# Altium PCB PCB1.PcbDoc (part 1 of 6)
Units mil, origin at the board's own origin, x right, y up, seen from the top; angles counter-clockwise.
Board outline 58000 x 19845 mil, 4 copper layers (Top Layer, MidLayer1, MidLayer2, Bottom Layer); 162 components, 222 nets, 4894 pads, 2245 vias.
Unrouted connection lines stored in the file: 192.
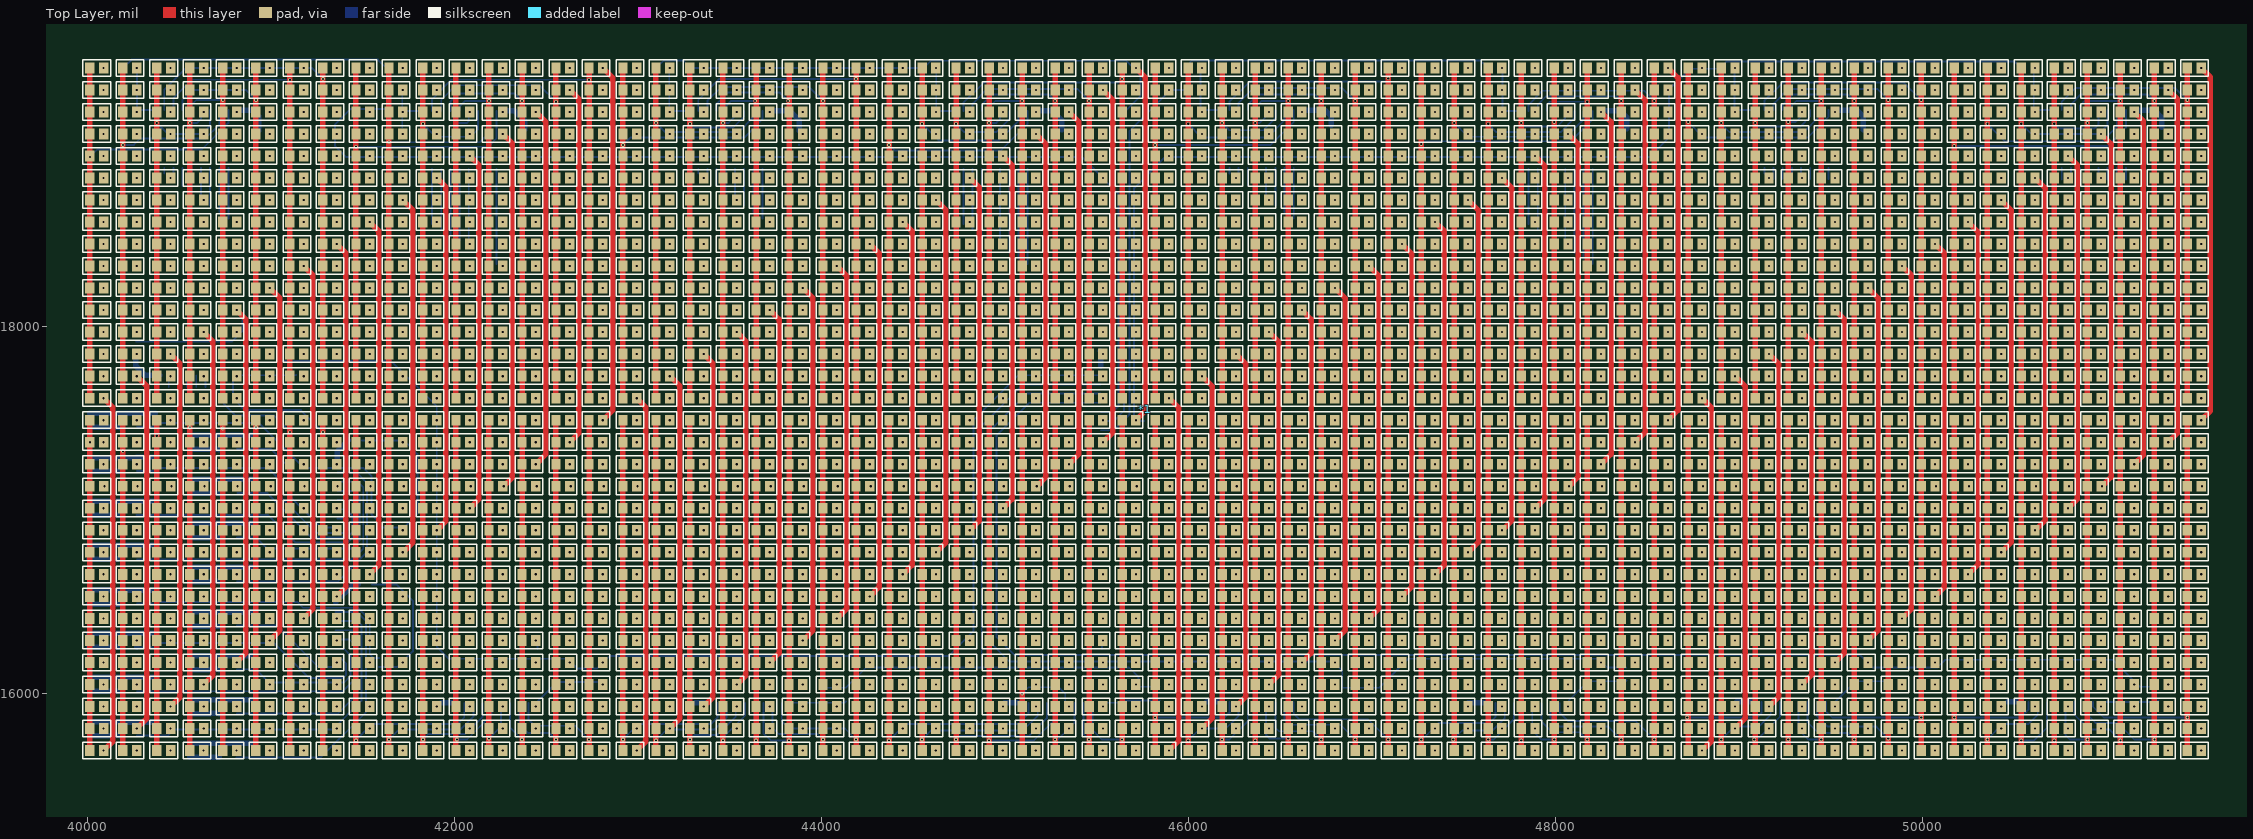
[diagram p0: Top Layer view]
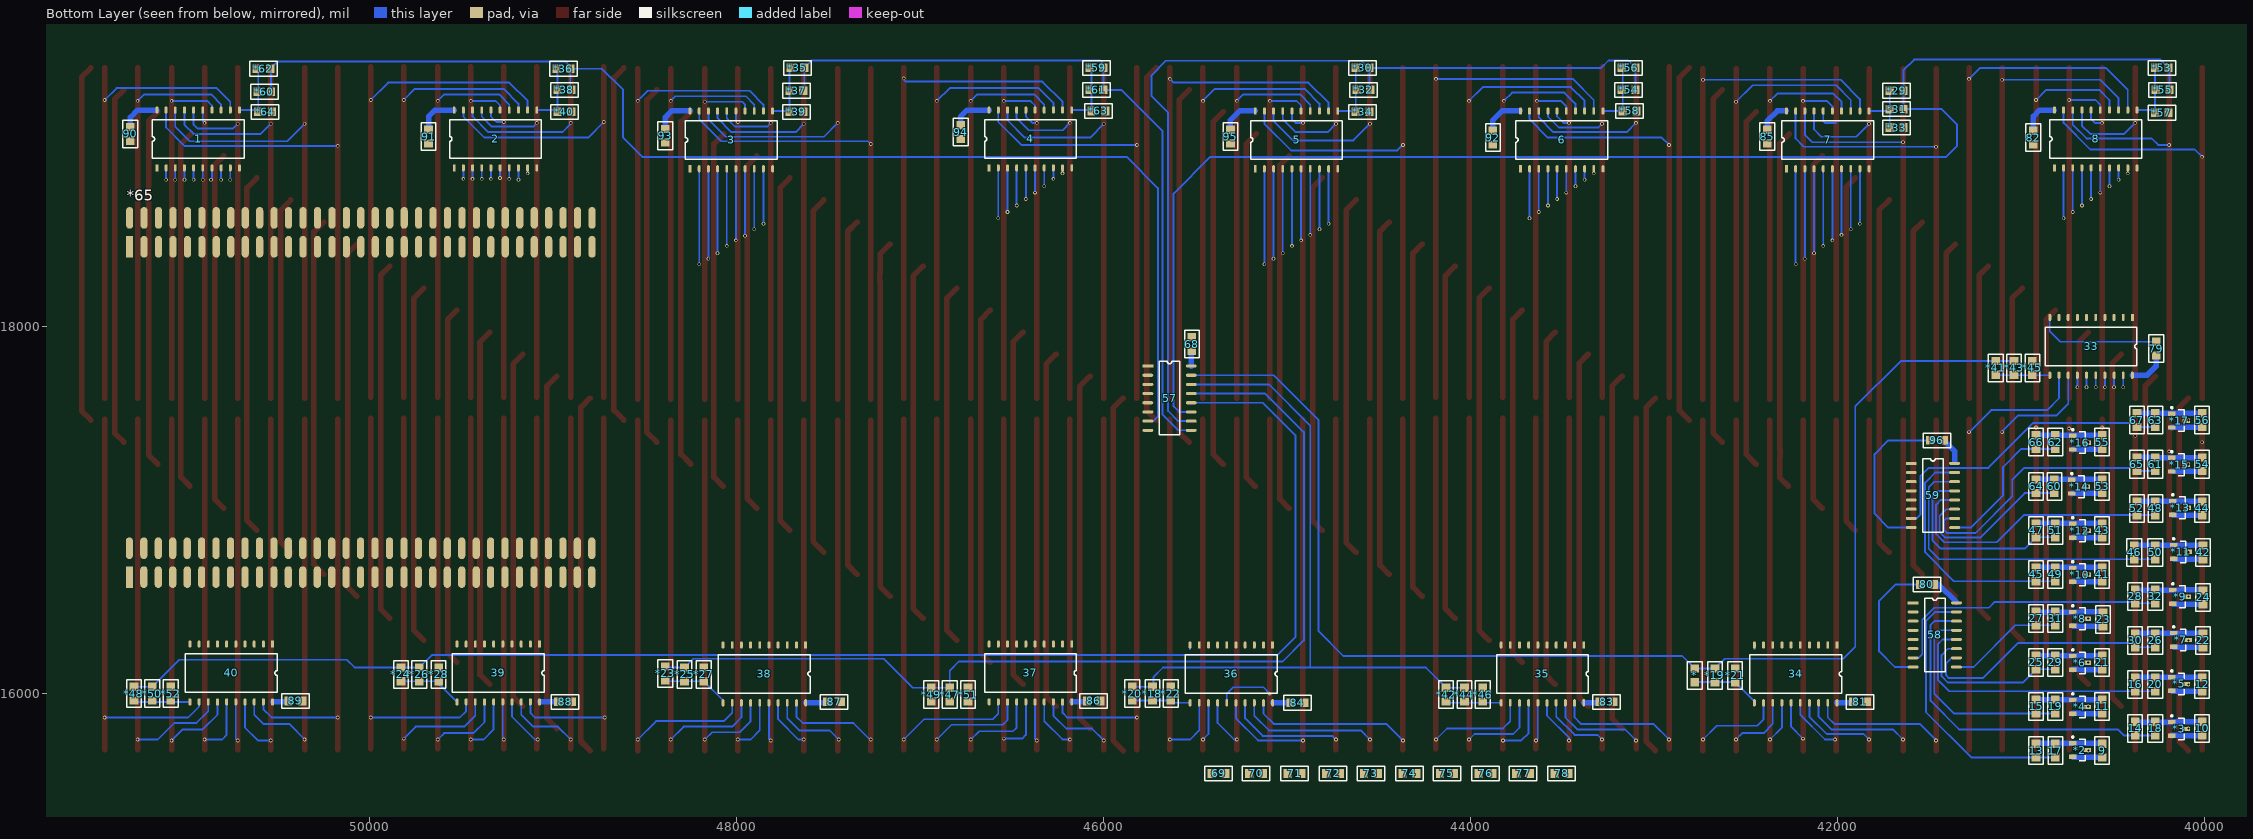
[diagram p1: Bottom Layer view, seen from below]
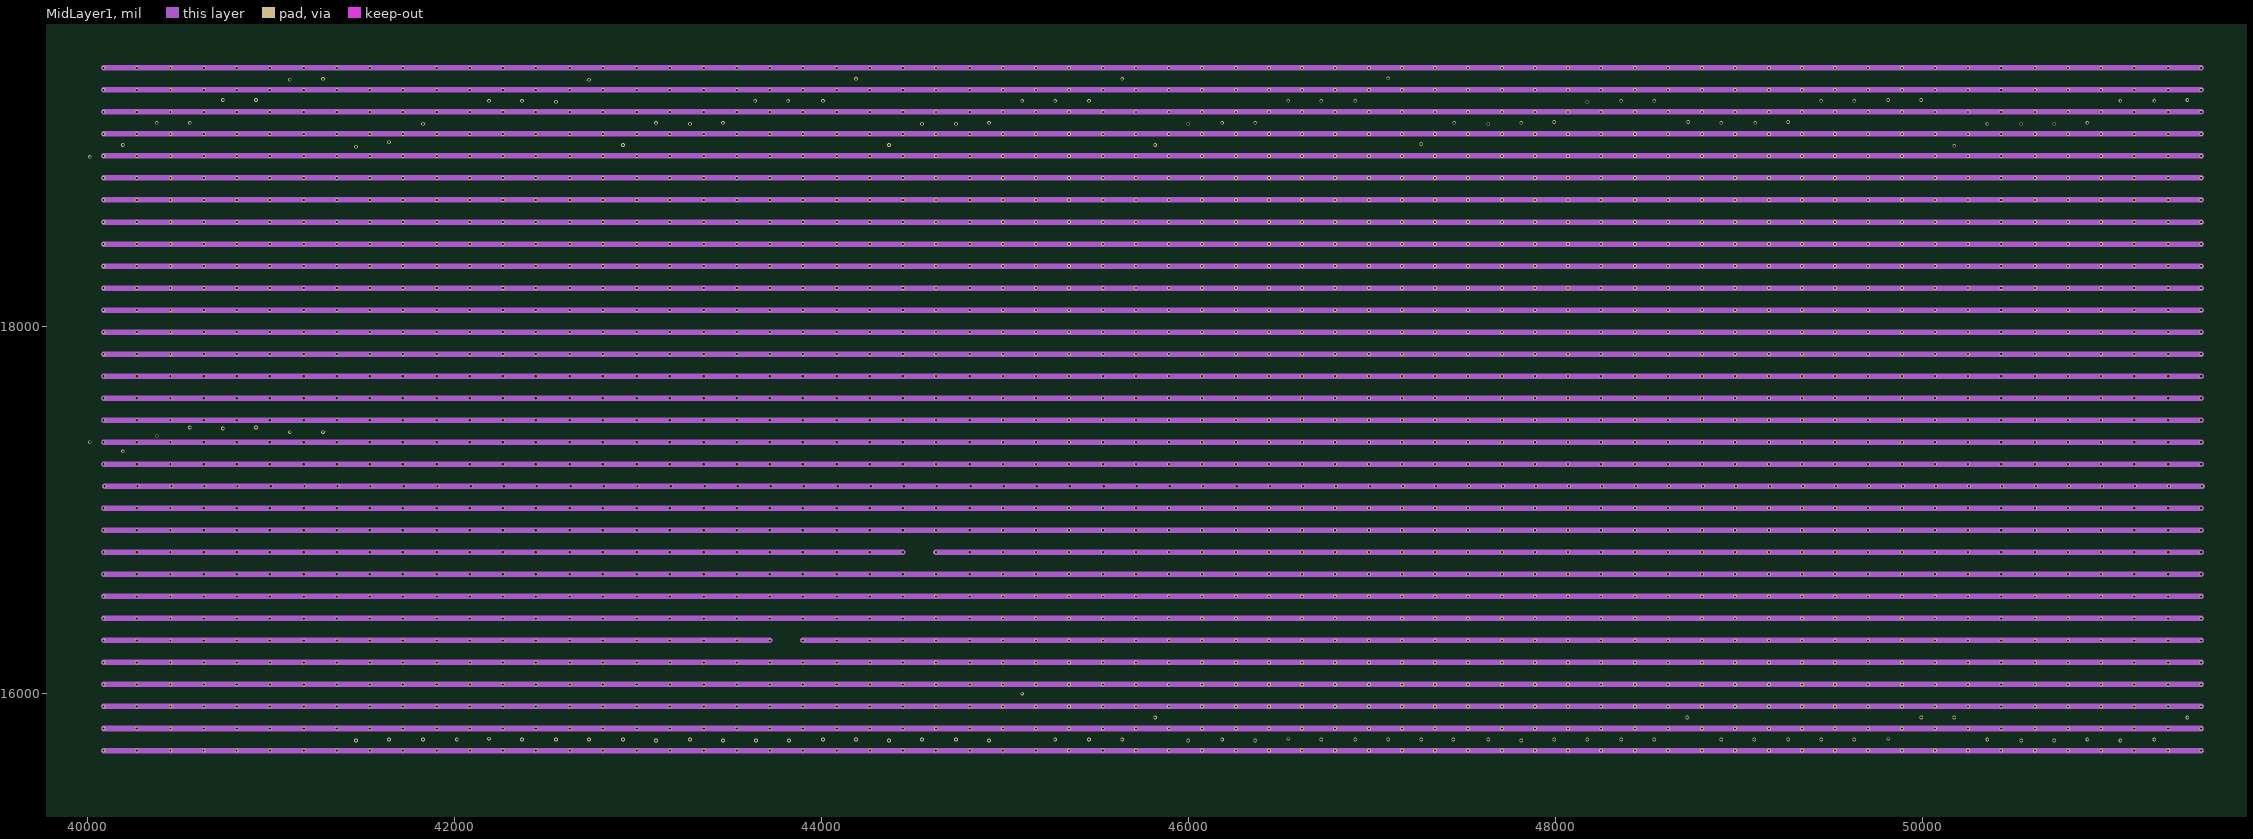
[diagram p2: MidLayer1]
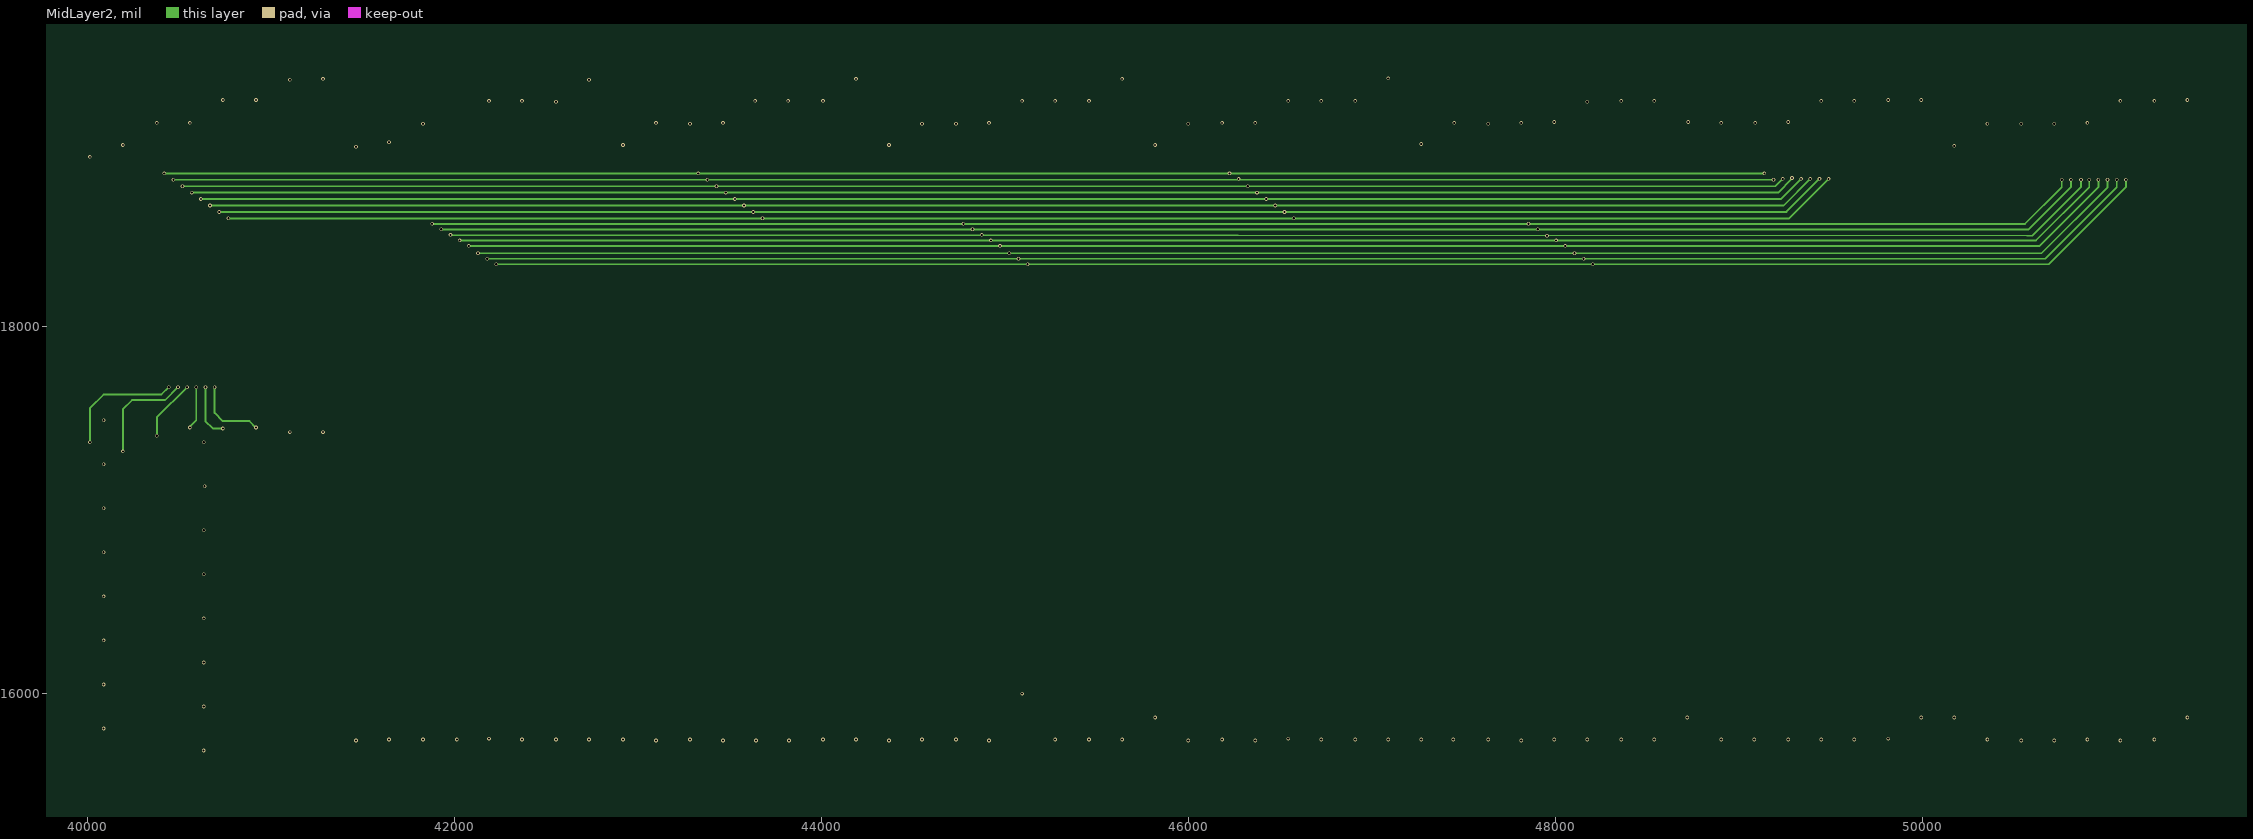
[diagram p3: MidLayer2]

## Layer stack, top to bottom
Top Layer: signal copper 1.4
Dielectric: core 12.6, FR-4, Dk 4.8
MidLayer1: signal copper 1.4
Dielectric: prepreg 12.6, FR-4, Dk 4.8
MidLayer2: signal copper 1.4
Dielectric: core 12.6, FR-4, Dk 4.8
Bottom Layer: signal copper 1.4

## Board outline
12075,28155 12075,8385 70000,8385 70075,8310 65615,12770 65615,28075 12155,28075 12075,28155

## Design rules (kind name [scope] priority, off if disabled: settings)
Clearance [All] p1: gap=10
ComponentClearance [All] p1: gap=10 collisioncheckmode=3 verticalgap=10
PolygonConnect [All] p1: connectstyle=Relief reliefconductorwidth=10 reliefentries=4 polygonreliefangle="90 Angle"
RoutingVias [All] p1: holewidth=28 width=50 viastyle="Through Hole" minholewidth=28 minwidth=50 maxholewidth=28 maxwidth=50
SolderMaskExpansion [All] p1: expansion=4
TestPointUsage [All] p1: valid=0 allowmultiple=FALSE
Testpoint [All] p1: side=3 testpointundercomponent=TRUE minsize=40 maxsize=100 preferedsize=60 minholesize=0 maxholesize=40 preferedholesize=32 testpointgrid=1 style=297 order=0123456789
Width Width_1 [InNet('AOG0','AOG1','AOG2','AOG3','AOG4','AOG5','AOG6','AOG7','AOG8','AOG9','AOG10','AOG11','AOG12','AOG13','AOG14','AOG15')] p1: maxlimit=10 minlimit=10 preferedwidth=10
Width [All] p2: maxlimit=30 minlimit=10 preferedwidth=10
18 further rules are at their usual default settings.

## Components (designator, comment, footprint, x,y, rotation, side; value= is the part's Value field where it differs from the comment)
1 "SN74LVTH574" SN74LVTH574 51160,18865 r90 bottom
2 "SN74LVTH574" SN74LVTH574 49540,18865 r90 bottom
3 "SN74LVTH574" SN74LVTH574 48255,18860 r90 bottom
4 "SN74LVTH574" SN74LVTH574 46625,18865 r90 bottom
5 "SN74LVTH574" SN74LVTH574 45175,18860 r90 bottom
6 "SN74LVTH574" SN74LVTH574 43730,18860 r90 bottom
7 "SN74LVTH574" SN74LVTH574 42280,18860 r90 bottom
8 "SN74LVTH574" SN74LVTH574 40820,18865 r90 bottom
9 "560Ohm" 104 40560,15690 r270 bottom
10 "560Ohm" 104 40015,15810 r270 bottom
11 "560Ohm" 104 40560,15930 r270 bottom
12 "560Ohm" 104 40015,16050 r270 bottom
13 "20Ohm" 104 40920,15690 r270 bottom
14 "20Ohm" 104 40380,15810 r270 bottom
15 "20Ohm" 104 40920,15930 r270 bottom
16 "20Ohm" 104 40380,16050 r270 bottom
17 "104" 104 40814.8,15690 r90 bottom
18 "104" 104 40270.2,15810 r90 bottom
19 "104" 104 40815,15930 r90 bottom
20 "104" 104 40270.2,16050 r90 bottom
21 "560Ohm" 104 40560,16170 r270 bottom
22 "560Ohm" 104 40010,16290 r270 bottom
23 "560Ohm" 104 40555,16405 r270 bottom
24 "560Ohm" 104 40010,16525 r270 bottom
25 "20Ohm" 104 40920,16170 r270 bottom
26 "20Ohm" 104 40270.2,16290 r270 bottom
27 "20Ohm" 104 40920,16410 r270 bottom
28 "20Ohm" 104 40380,16530 r270 bottom
29 "104" 104 40815,16170 r90 bottom
30 "104" 104 40380,16290 r90 bottom
31 "104" 104 40815,16410 r90 bottom
32 "104" 104 40270.2,16530 r90 bottom
33 "SN74LVTH574" SN74LVTH574 40395,18050 r270 bottom
34 "SN74LVTH574" SN74LVTH574 42005,16265 r270 bottom
35 "SN74LVTH574" SN74LVTH574 43385,16265 r270 bottom
36 "SN74LVTH574" SN74LVTH574 45080,16265 r270 bottom
37 "SN74LVTH574" SN74LVTH574 46175,16270 r270 bottom
38 "SN74LVTH574" SN74LVTH574 47625,16265 r270 bottom
39 "SN74LVTH574" SN74LVTH574 49075,16270 r270 bottom
40 "SN74LVTH574" SN74LVTH574 50530,16270 r270 bottom
41 "560Ohm" 104 40560,16650 r270 bottom
42 "560Ohm" 104 40010,16770 r270 bottom
43 "560Ohm" 104 40560,16890 r270 bottom
44 "560Ohm" 104 40015,17010 r270 bottom
45 "20Ohm" 104 40920,16650 r270 bottom
46 "20Ohm" 104 40385,16770 r270 bottom
47 "20Ohm" 104 40920,16890 r270 bottom
48 "20Ohm" 104 40269.8,17010 r270 bottom
49 "104" 104 40815,16650 r90 bottom
50 "104" 104 40270.2,16770 r90 bottom
51 "104" 104 40815,16890 r90 bottom
52 "104" 104 40370,17010 r90 bottom
53 "560Ohm" 104 40560,17130 r270 bottom
54 "560Ohm" 104 40015,17250 r270 bottom
55 "560Ohm" 104 40560,17370 r270 bottom
56 "560Ohm" 104 40015,17490 r270 bottom
57 "MC74AC138" MC74AC138 45760,17785 r180 bottom
58 "MC74AC138" MC74AC138 41590,16495 r180 bottom
59 "MC74AC138" MC74AC138 41600,17255 r180 bottom
60 "20Ohm" 104 40820,17130 r270 bottom
61 "20Ohm" 104 40270.2,17250 r270 bottom
62 "20Ohm" 104 40815,17370 r270 bottom
63 "20Ohm" 104 40270.2,17490 r270 bottom
64 "104" 104 40920,17130 r90 bottom
65 "104" 104 40370,17250 r90 bottom
66 "104" 104 40920,17370 r90 bottom
67 "104" 104 40370,17490 r90 bottom
68 "104" 104 45520,17905 r90 bottom
69 "104" 104 45375,15565 r180 bottom
70 "104" 104 45170,15565 r180 bottom
71 "104" 104 44960,15565 r180 bottom
72 "104" 104 44750,15565 r180 bottom
73 "104" 104 44545,15565 r180 bottom
74 "104" 104 44335,15565 r180 bottom
75 "104" 104 44130,15565 r180 bottom
76 "104" 104 43920,15565 r180 bottom
77 "104" 104 43715,15565 r180 bottom
78 "104" 104 43505,15565 r180 bottom
79 "104" 104 40265,17880 r90 bottom
80 "104" 104 41515,16595 r0 bottom
81 "104" 104 41880,15955 r180 bottom
82 "104" 104 40935,19030 r270 bottom
83 "104" 104 43260,15955 r180 bottom
84 "104" 104 44945,15950 r180 bottom
85 "104" 104 42385,19035 r270 bottom
86 "104" 104 46055,15960 r180 bottom
87 "104" 104 47470,15955 r180 bottom
88 "104" 104 48935,15955 r180 bottom
89 "104" 104 50405,15960 r180 bottom
90 "104" 104 51305,19050 r270 bottom
91 "104" 104 49680,19035 r270 bottom
92 "104" 104 43880,19030 r270 bottom
93 "104" 104 48390,19040 r270 bottom
94 "104" 104 46780,19060 r270 bottom
95 "104" 104 45310,19035 r270 bottom
96 "104" 104 41460,17380 r0 bottom
* "30PF" 104 42780,16100 r270 bottom
*1 "LED_3264" LED_3264 50845,19425 r0 top
*2 "AO3401" AO3401 40720,15730 r180 bottom
*3 "AO3401" AO3401 40180,15845 r180 bottom
*4 "AO3401" AO3401 40720,15965 r180 bottom
*5 "AO3401" AO3401 40180,16090 r180 bottom
*6 "AO3401" AO3401 40720,16205 r180 bottom
*7 "AO3401" AO3401 40170,16330 r180 bottom
*8 "AO3401" AO3401 40720,16445 r180 bottom
*9 "AO3401" AO3401 40175,16565 r180 bottom
*10 "AO3401" AO3401 40720,16685 r180 bottom
*11 "AO3401" AO3401 40170,16810 r180 bottom
*12 "AO3401" AO3401 40720,16925 r180 bottom
*13 "AO3401" AO3401 40175,17050 r180 bottom
*14 "AO3401" AO3401 40725,17165 r180 bottom
*15 "AO3401" AO3401 40180,17285 r180 bottom
*16 "AO3401" AO3401 40720,17405 r180 bottom
*17 "AO3401" AO3401 40180,17525 r180 bottom
*18 "30PF" 104 45735,16000 r270 bottom
*19 "1KOhm" 104 42670,16100 r270 bottom
*20 "1KOhm" 104 45845,16000 r270 bottom
*21 "10kOhm" 104 42560,16100 r270 bottom
*22 "10kOhm" 104 45635,16000 r270 bottom
*23 "30PF" 104 48390,16110 r270 bottom
*24 "30PF" 104 49830,16105 r270 bottom
*25 "1KOhm" 104 48285,16105 r270 bottom
*26 "1KOhm" 104 49730,16105 r270 bottom
*27 "10kOhm" 104 48180,16105 r270 bottom
*28 "10kOhm" 104 49625,16105 r270 bottom
*29 "30PF" 104 41680,19285 r0 bottom
*30 "30PF" 104 44590,19410 r0 bottom
*31 "1KOhm" 104 41680,19185 r0 bottom
*32 "1KOhm" 104 44585,19290 r0 bottom
*33 "10kOhm" 104 41680,19085 r0 bottom
*34 "10kOhm" 104 44590,19170 r0 bottom
*35 "30PF" 104 47670,19410 r0 bottom
*36 "30PF" 104 48945,19405 r0 bottom
*37 "1KOhm" 104 47675,19285 r0 bottom
*38 "1KOhm" 104 48940,19290 r0 bottom
*39 "10kOhm" 104 47675,19170 r0 bottom
*40 "10kOhm" 104 48940,19170 r0 bottom
*41 "30PF" 104 41140,17775 r270 bottom
*42 "30PF" 104 44135,15995 r270 bottom
*43 "1KOhm" 104 41040,17775 r270 bottom
*44 "1KOhm" 104 44035,15995 r270 bottom
*45 "10kOhm" 104 40940,17775 r270 bottom
*46 "10kOhm" 104 43935,15995 r270 bottom
*47 "30PF" 104 46840,15995 r270 bottom
*48 "30PF" 104 51285,16000 r270 bottom
*49 "1KOhm" 104 46940,15995 r270 bottom
*50 "1KOhm" 104 51185,16000 r270 bottom
*51 "10kOhm" 104 46740,15995 r270 bottom
*52 "10kOhm" 104 51085,16000 r270 bottom
*53 "30PF" 104 40235,19410 r0 bottom
*54 "30PF" 104 43140,19290 r0 bottom
*55 "1KOhm" 104 40230,19290 r0 bottom
*56 "1KOhm" 104 43140,19410 r0 bottom
*57 "10kOhm" 104 40235,19165 r0 bottom
*58 "10kOhm" 104 43135,19175 r0 bottom
*59 "30PF" 104 46040,19410 r0 bottom
*60 "30PF" 104 50575,19280 r0 bottom
*61 "1KOhm" 104 46040,19290 r0 bottom
*62 "1KOhm" 104 50580,19405 r0 bottom
*63 "10kOhm" 104 46030,19175 r0 bottom
*64 "10kOhm" 104 50570,19170 r0 bottom
*65 "STM32F407ZET6" STM32F407ZET6 50055,17605 r90 bottom

## Footprints (in the part's own frame and the unit in brackets; to place one, negate y for a bottom-side part, rotate by r counter-clockwise, add the part's x,y. Pads: shape width x height; smd on the part's side, far side on the other; paste and mask are expansions set on the pad)
104 [mm]
  rect 1.14x1.2 smd: 1(-0.95,0) 2(0.95,0)
  silkscreen extent -1.91,-1.02 1.91,1.02
AO3401 [mm]
  rect 1x0.6 smd: 1(2,-0.95) 2(0,0) 3(0,-1.9)
  silkscreen extent -0.13,-2.45 1.7,0.97
LED_3264 [mm]